# Altium PCB PCB1.PcbDoc
Units mm, origin at the board's own origin, x right, y up, seen from the top; angles counter-clockwise.
Board outline 130 x 90 mm, 4 copper layers (Top Layer, GND, PWR, Bottom Layer), stack 1.506 mm thick; 79 components, 53 nets, 215 pads, 3 vias.
Unrouted connection lines stored in the file: 20.
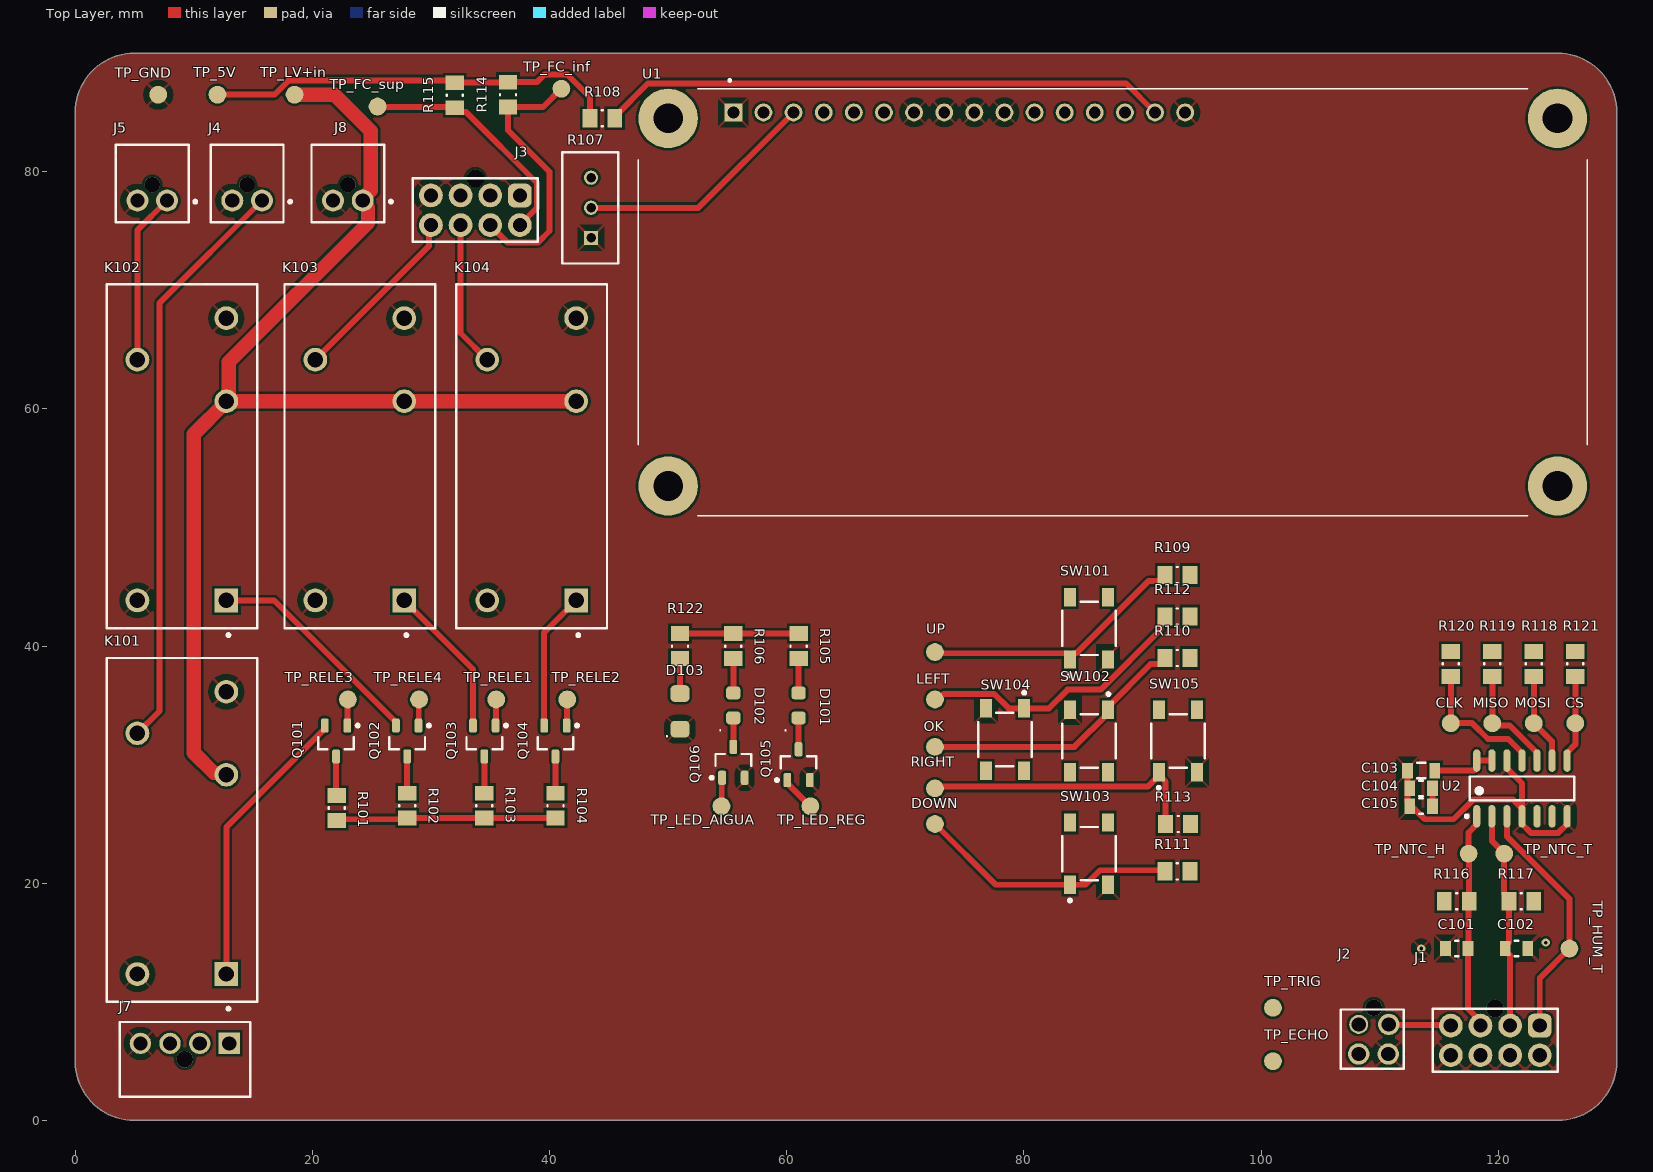
[diagram p0: Top Layer view]
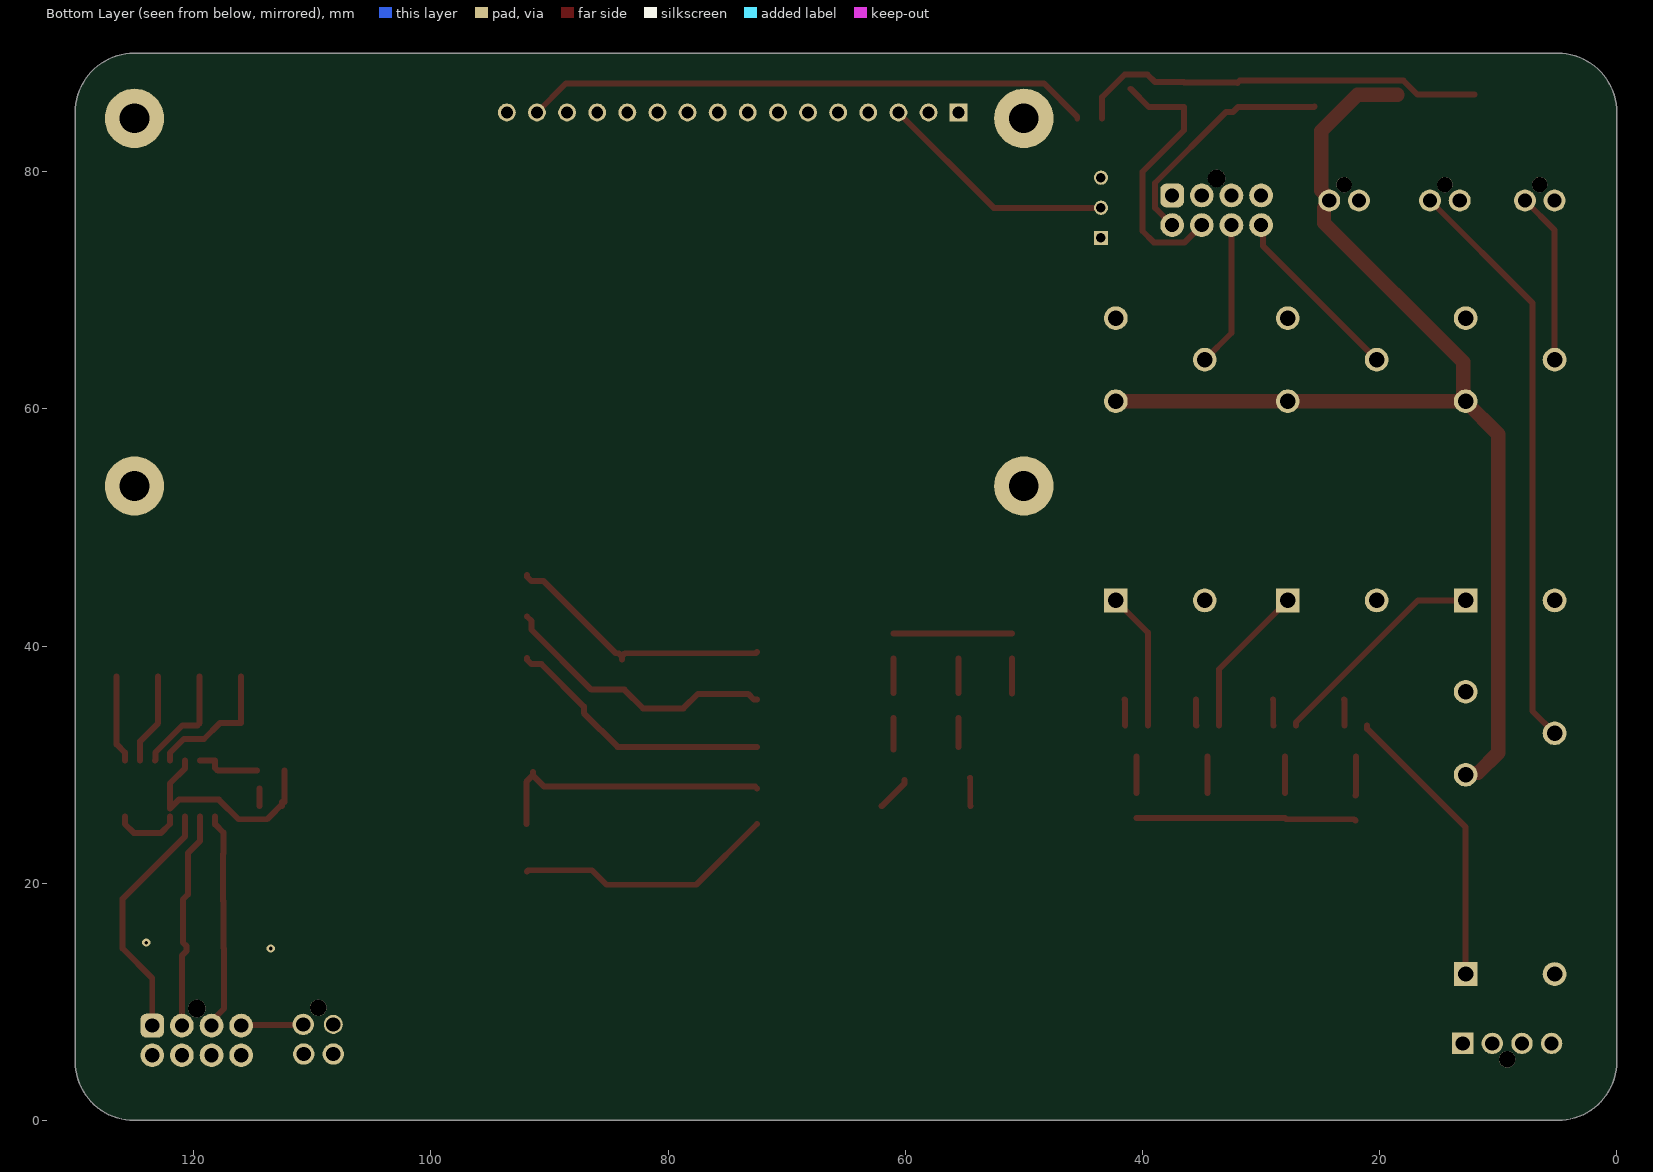
[diagram p1: Bottom Layer view, seen from below]
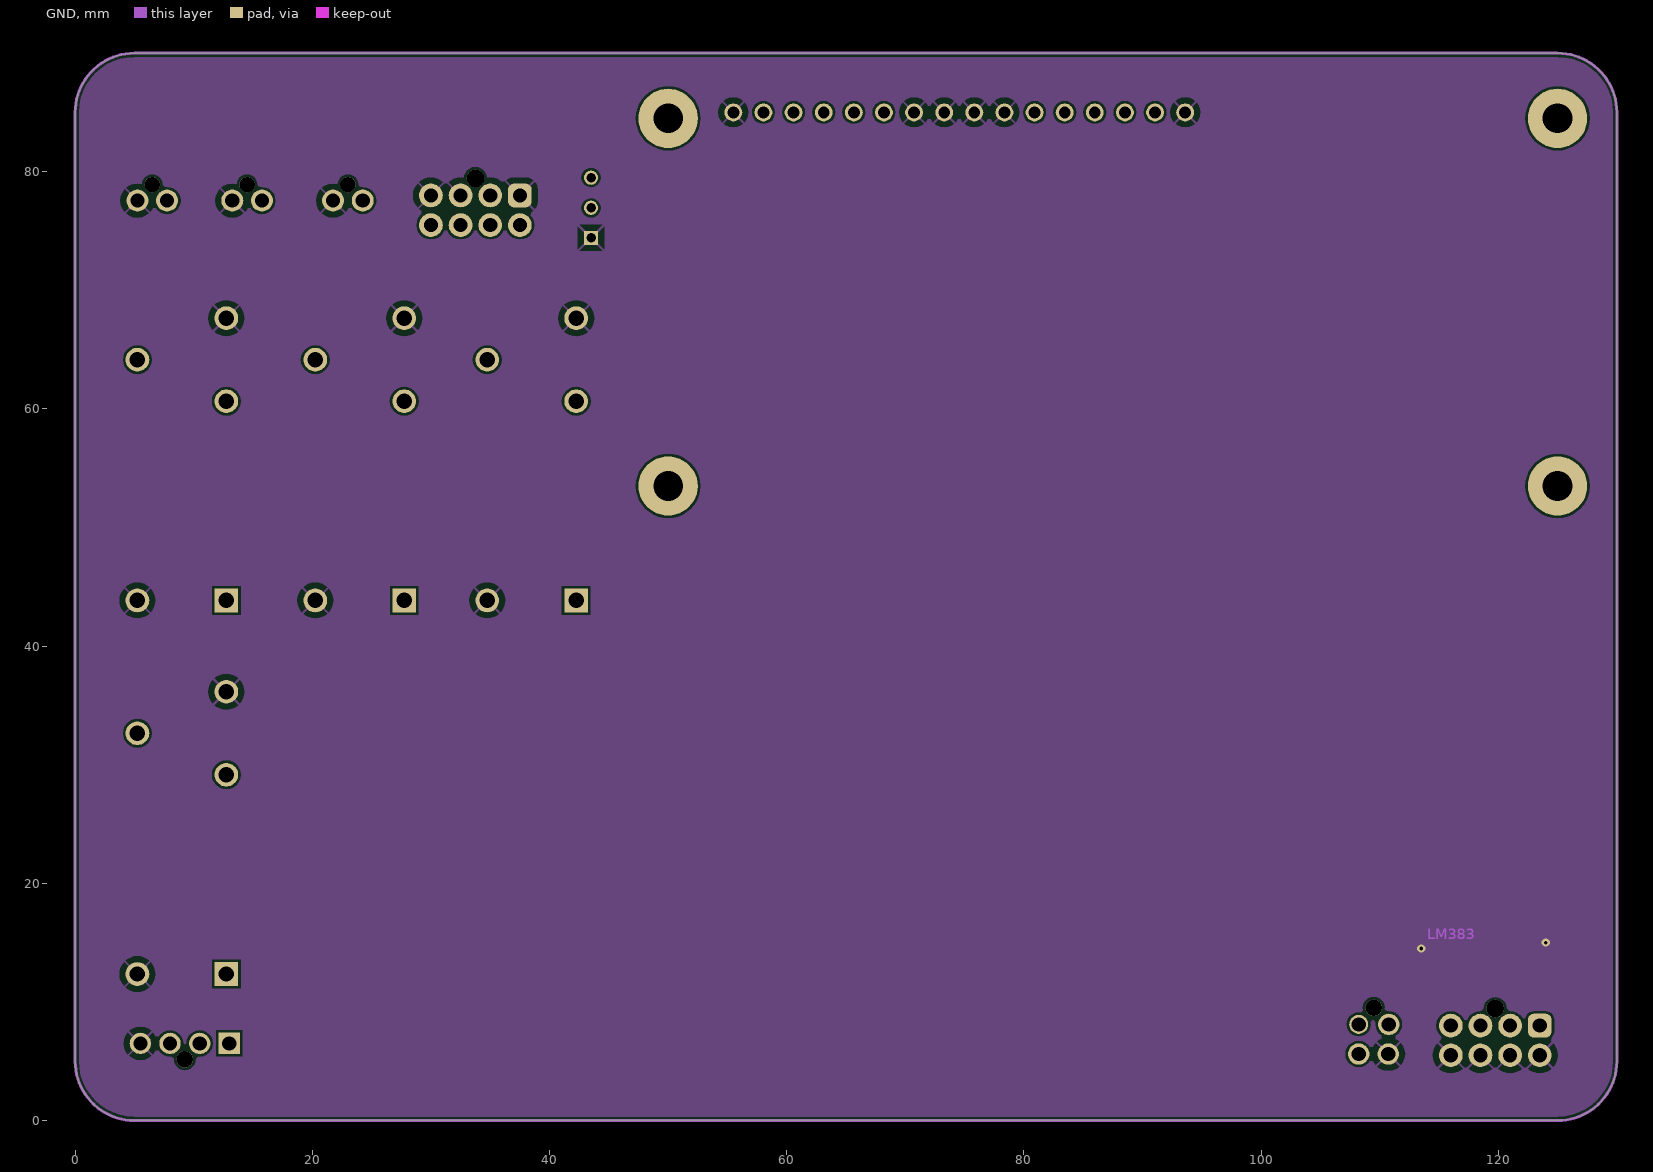
[diagram p2: GND]
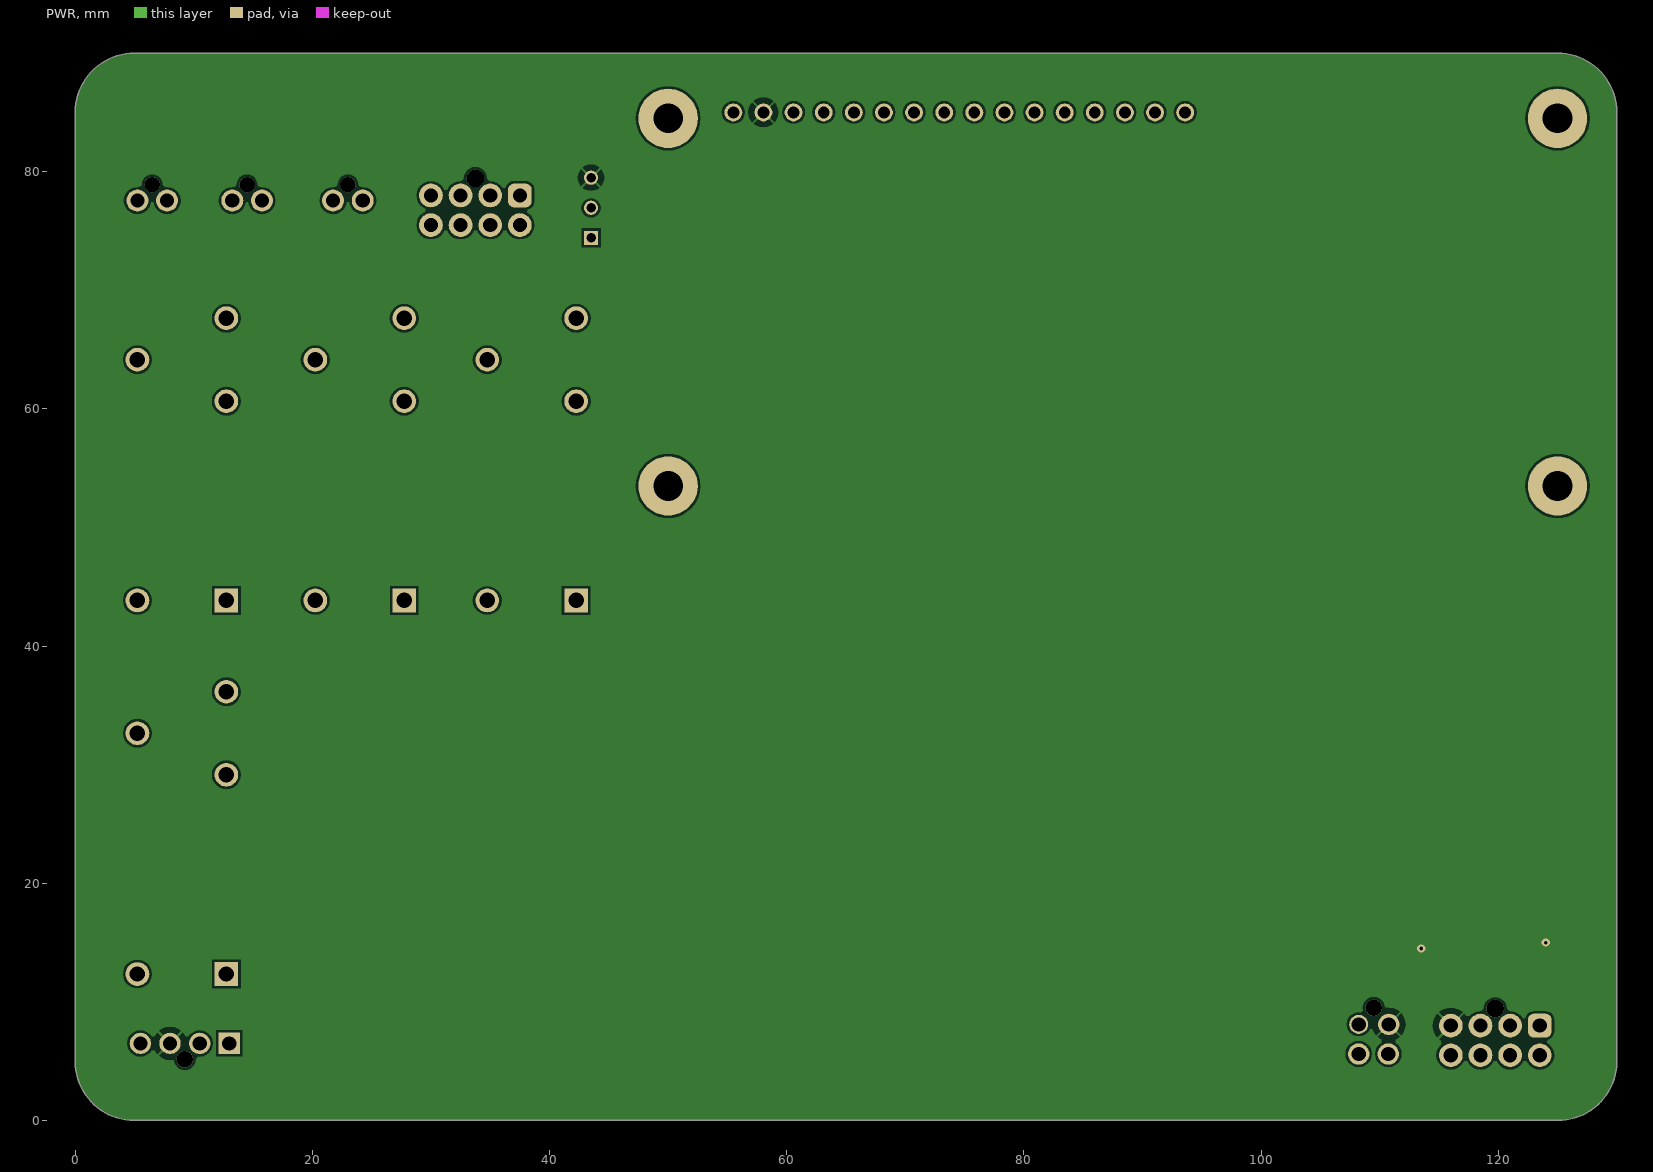
[diagram p3: PWR]
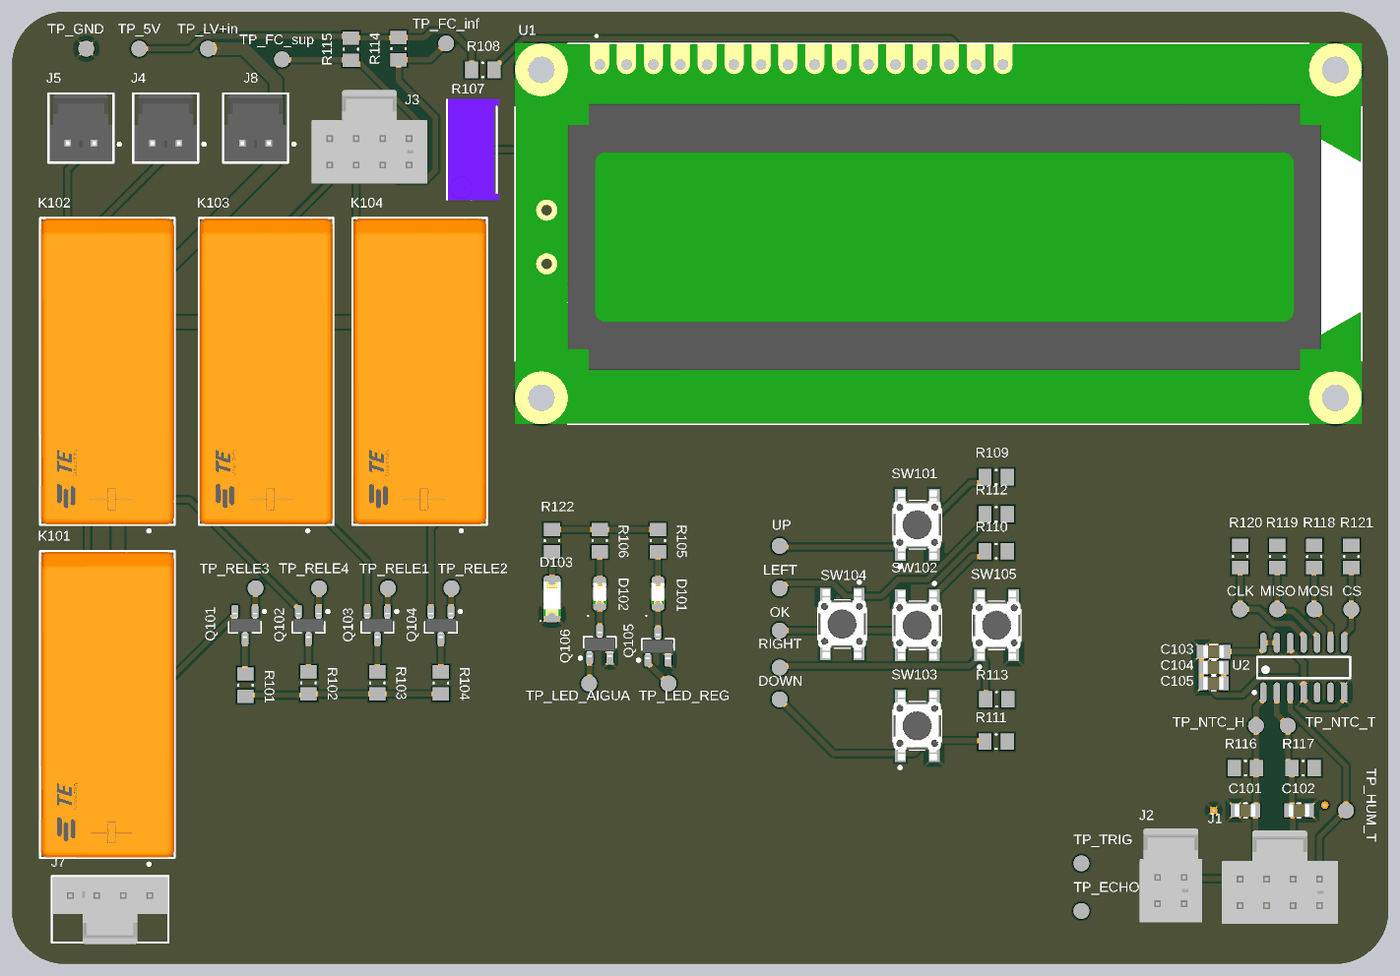
[diagram p4: 3D render of the assembled board from above, using the file's embedded part models]

## Layer stack, top to bottom
Top Solder: solder mask 0.01, Solder Resist, Dk 3.5
Top Layer: signal copper 0.035
Dielectric 2: prepreg 0.1, PP-006, Dk 4.1
GND: signal copper 0.018
Dielectric 4: prepreg 0.1, PP-006, Dk 4.1
Dielectric 1: dielectric 1, FR-4, Dk 4.8
Dielectric 5: prepreg 0.1, PP-006, Dk 4.1
PWR: signal copper 0.018
Dielectric 3: prepreg 0.1, PP-006, Dk 4.1
Bottom Layer: signal copper 0.035
Bottom Solder: solder mask 0.01, Solder Resist, Dk 3.5

## Board outline
0,5 0,85 cw(c5,85) 5,90 125,90 cw(c125,85) 130,85 130,5 cw(c125,5) 125,0 5,0 cw(c5,5)

## Design rules (kind name [scope] priority, off if disabled: settings)
Clearance [All] p1: gap=0.2 ignorepadtopadclearanceinfootprint=FALSE except(0.15: THPad-Hole)
ComponentClearance [All] p1: gap=0.2 collisioncheckmode=3 verticalgap=0.2 showdistances=FALSE
HoleSize [All] p1: absolutevalues=TRUE maxlimit=5 minlimit=0.15 maxpercent=80.000 minpercent=20.000
PlaneClearance [All] p1: clearance=0.5
PlaneConnect [All] p1: planeconnectstyle=Relief reliefexpansion=0.5 reliefentries=4 reliefconductorwidth=0.2 reliefairgap=0.5
PolygonConnect [All] p1: connectstyle=Relief reliefconductorwidth=0.2 reliefentries=4 polygonreliefangle="45 Angle" airgapwidth=0.5
RoutingCorners [All] p1: cornerstyle=45-Degree minsetback=2.5 maxsetback=2.5
RoutingVias [All] p1: holewidth=0.3 width=0.7 viastyle="Through Hole" minholewidth=0.2 minwidth=0.5 maxholewidth=5 maxwidth=8
SolderMaskExpansion [All] p1: expansion=0.102 istentingtop=FALSE
SupplyNets "Schematic Supply Nets_2" [InNet('GND')] p1: voltage=0.000
SupplyNets "Schematic Supply Nets_1" [InNet('+5')] p2: voltage=0.000
SupplyNets "Schematic Supply Nets" [InNet('LV+in')] p3: voltage=0.000
UnRoutedNet [All] p1: checkbadconnections=TRUE
Width [All] p1: maxlimit=5 minlimit=0.2 preferedwidth=0.5 midlayer1_minwidth=0.254 midlayer2_minwidth=0.254 minimp=50.000000 maximp=50.000000 favimp=50.000000
24 further rules are at their usual default settings.

## Components (designator, comment, footprint, x,y, rotation, side; value= is the part's Value field where it differs from the comment)
C101 "C100n" C0805FNPC-R 116.5,14.5 r0 top value=100nF
C102 "C100n" C0805FNPC-R 121.55,14.5 r180 top value=100nF
C103 "C100p" C0805FNPC-W 113.5,29.5 r0 top value=100pF
C104 "C100n" C0805FNPC-R 113.5,28 r0 top value=100nF
C105 "C1u" C0805FNPC-R 113.5,26.5 r0 top value=1µF
CLK "TestPoint" TestPoint 116,33.5 r90 top (schematic designator TP_CLK)
CS "TestPoint" TestPoint 126.5,33.5 r90 top (schematic designator TP_CS)
D101 "LEDYS-0805-120" LED_0805_WE 61,35 r90 top
D102 "LEDRS-0805-150" LED_0805_WE 55.5,35 r90 top
D103 "LEDGS-1206-450" LED_1206_WE 51,34.5 r90 top
DOWN "TestPoint" TestPoint 72.5,25 r180 top (schematic designator TP_DOWN)
J1 "J_NanoFit_2x4_V" J_NanoFit_2x4_V 119.75,7.469 r0 top locked
J2 "Molex_NanoFit_2x2" J_NanoFit_2x2_V 109.5,7.551 r0 top
J3 "J_NanoFit_2x4_V" J_NanoFit_2x4_V 33.75,77.468 r0 top
J4 "J_NanoFit_1x2" FP-105309-1102-MFG 14.5,79 r180 top
J5 "J_NanoFit_1x2" FP-105309-1102-MFG 6.5,79 r180 top
J7 "J_NanoFit_1x4_V" J_NanoFit_1x4_V 9.25,6.5 r0 top
J8 "J_NanoFit_1x2" FP-105309-1102-MFG 23,79 r180 top
K101 "Relay_RZ01-1C4-D005" FP-1415899-7-MFG 9,24.5 r90 top
K102 "Relay_RZ01-1C4-D005" FP-1415899-7-MFG 9,56 r90 top
K103 "Relay_RZ01-1C4-D005" FP-1415899-7-MFG 24,56 r90 top
K104 "Relay_RZ01-1C4-D005" FP-1415899-7-MFG 38.5,56 r90 top
LEFT "TestPoint" TestPoint 72.5,35.5 r180 top (schematic designator TP_LEFT)
MISO "TestPoint" TestPoint 119.5,33.5 r90 top (schematic designator TP_MISO)
MOSI "TestPoint" TestPoint 123,33.5 r90 top (schematic designator TP_MOSI)
OK "TestPoint" TestPoint 72.5,31.5 r180 top (schematic designator TP_OK)
Q101 "TRT-NPN" TRT-NPN-0.5/45-SOT23 22,32 r270 top
Q102 "TRT-NPN" TRT-NPN-0.5/45-SOT23 28,32 r270 top
Q103 "TRT-NPN" TRT-NPN-0.5/45-SOT23 34.5,32 r270 top
Q104 "TRT-NPN" TRT-NPN-0.5/45-SOT23 40.5,32 r270 top
Q105 "TRT-NPN" TRT-NPN-0.5/45-SOT23 61,30 r90 top
Q106 "TRT-NPN" TRT-NPN-0.5/45-SOT23 55.5,30.2 r90 top
R101 "R1K" 0805 22.05,26.35 r180 top value=1k
R102 "R1K" 0805 28,26.55 r180 top value=1k
R103 "R1K" 0805 34.5,26.55 r180 top value=1k
R104 "R1K" 0805 40.5,26.55 r180 top value=1k
R105 "R1K" 0805 61,40 r0 top value=1k
R106 "R1K" 0805 55.5,40 r0 top value=1k
R107 "R10k-VTR" R10k-VTR 43.5,76.96 r180 top value=10k
R108 "R1K" 0805 44.45,84.5 r90 top value=1k
R109 "R4K7" 0805 92.95,46 r270 top value=1k
R110 "R4K7" 0805 92.95,39 r270 top value=1k
R111 "R4K7" 0805 92.95,21 r270 top value=1k
R112 "R4K7" 0805 92.95,42.5 r270 top value=1k
R113 "R4K7" 0805 93,25 r270 top value=1k
R114 "R4K7" 0805 36.5,86.5 r0 top value=1k
R115 "R4K7" 0805 32,86.45 r0 top value=1k
R116 "R10K" 0805 116.5,18.5 r90 top value=1k
R117 "R10K" 0805 121.95,18.5 r270 top value=1k
R118 "R10K" 0805 123,38.5 r0 top value=1k
R119 "R10K" 0805 119.5,38.5 r0 top value=1k
R120 "R10K" 0805 116,38.5 r180 top value=1k
R121 "R10K" 0805 126.5,38.5 r180 top value=1k
R122 "R1K" 0805 51,40 r0 top value=1k
RIGHT "TestPoint" TestPoint 72.5,28 r180 top (schematic designator TP_RIGHT)
SW101 "tact_switch" FP-PTS647SK38SMTR2LFS-MFG 85.5,41.5 r90 top
SW102 "tact_switch" FP-PTS647SK38SMTR2LFS-MFG 85.5,32 r270 top
SW103 "tact_switch" FP-PTS647SK38SMTR2LFS-MFG 85.5,22.5 r90 top
SW104 "tact_switch" FP-PTS647SK38SMTR2LFS-MFG 78.4,32.125 r270 top
SW105 "tact_switch" FP-PTS647SK38SMTR2LFS-MFG 93,32 r90 top
TP_5V "TestPoint" TestPoint 12,86.5 r90 top
TP_ECHO "TestPoint" TestPoint 101,5 r90 top
TP_FC_inf "TestPoint" TestPoint 41,87 r270 top
TP_FC_sup "TestPoint" TestPoint 25.5,85.5 r270 top
TP_GND "TestPoint" TestPoint 7,86.5 r90 top
TP_HUM_T "TestPoint" TestPoint 126,14.5 r90 top
TP_LED_AIGUA "TestPoint" TestPoint 54.5,26.5 r270 top
TP_LED_REG "TestPoint" TestPoint 62,26.5 r270 top
TP_LV+in "TestPoint" TestPoint 18.5,86.5 r90 top
TP_NTC_H "TestPoint" TestPoint 117.5,22.5 r90 top
TP_NTC_T "TestPoint" TestPoint 120.5,22.5 r90 top
TP_RELE1 "TestPoint" TestPoint 35.5,35.5 r90 top
TP_RELE2 "TestPoint" TestPoint 41.5,35.5 r90 top
TP_RELE3 "TestPoint" TestPoint 23,35.5 r90 top
TP_RELE4 "TestPoint" TestPoint 29,35.5 r90 top
TP_TRIG "TestPoint" TestPoint 101,9.5 r90 top
U1 "LCD2X16" LCD_LCD2X16 87.5,69 r0 top
U2 "MCP3302-CI/SL" SOIC-SL14_L 122,28 r90 top
UP "TestPoint" TestPoint 72.5,39.5 r180 top (schematic designator TP_UP)

## Footprints (in the part's own frame and the unit in brackets; to place one, negate y for a bottom-side part, rotate by r counter-clockwise, add the part's x,y. Pads: shape width x height; smd on the part's side, far side on the other; paste and mask are expansions set on the pad)
0805 [mm] "Chip Resistor, 2-Leads, Body 2,60x1,50mm, IPC Medium Density"
  rect 1.55x1.25 smd: 1(0,-1.05) 2(0,1.05)
  silkscreen extent -0.67,-0.05 0.67,0.05, body extent -0.75,-1.3 0.75,1.3, height 0.6
C0805FNPC-R [mm]
  rect 0.9x1.3 smd: 1(-0.95,0) 2(0.95,0)
  silkscreen extent -0.15,-0.65 0.15,0.65, body extent -1.03,-0.63 0.97,0.63, height 0.96
C0805FNPC-W [mm]
  rect 0.9x1.3 smd: 1(-1.15,0) 2(1.15,0)
  silkscreen extent -0.35,-0.65 0.35,0.65, body extent -1,-0.63 1,0.63, height 0.96
FP-105309-1102-MFG [mm]
  round 1.85 hole 1.2 paste-2539.97 mask+0: 1(-1.25,1.43) 2(1.25,1.43)
  round 1.3 hole 1.3 unplated paste-2539.97 mask+0: ""(0,0.09)
  silkscreen extent -3.75,-3.27 3.07,3.27, body extent -3.17,-3.37 3.17,3.37, height 0.25
FP-1415899-7-MFG [mm]
  round 2 hole 1.3 paste-2539.97 mask+0: 11(8.15,3.75) 12(4.65,-3.75) 14(11.65,-3.75) A2(-12.15,3.75)
  rect 2x2 hole 1.3 paste-2539.97 mask+0: A1(-12.15,-3.75)
  silkscreen extent -15.2,-6.35 14.5,6.35, body extent -14.6,-6.45 14.6,6.45, height 0.25
FP-PTS647SK38SMTR2LFS-MFG [mm]
  rect 1.55x1 smd paste+0 mask+0: 1(-2.625,1.6) 2(2.625,1.6) 3(-2.625,-1.6) 4(2.625,-1.6)
  silkscreen extent -4.07,-2.25 2.25,2.25, body extent -3.5,-2.35 3.5,2.35, height 0.25
J_NanoFit_1x4_V [mm]
  round 1.4 hole 1.4: 0(0,-1.34)
  rect 1.8x1.8 hole 1.2: 1(3.75,0)
  round 1.8 hole 1.2: 2(1.25,0) 3(-1.25,0) 4(-3.75,0)
  silkscreen extent -5.5,-4.5 5.5,1.8, body extent -5.47,-4.65 5.47,1.69, height 10.68
J_NanoFit_2x2_V [mm]
  round 1.8 hole 1.2: 1(1.27,0.552) 2(1.23,-1.949) 4(-1.27,-1.949)
  round 1.6 hole 1.2: 3(-1.27,0.552)
  round 1.4 hole 1.4: 5(0,1.949)
  silkscreen extent -2.79,-3.2 2.54,1.8, body extent -3.02,-3.61 2.92,5.23, height 9.92
J_NanoFit_2x4_V [mm]
  rrect50% 2x2 hole 1.2: 1(3.75,0.532)
  round 2 hole 1.2: 2(1.25,0.532) 3(-1.25,0.532) 4(-3.75,0.532) 5(3.75,-1.968) 6(1.25,-1.968) 7(-1.25,-1.968) 8(-3.75,-1.968)
  round 1.5 hole 1.5: 9(-0.004,1.968)
  silkscreen extent -5.27,-3.37 5.27,1.97, body extent -5.47,-3.71 5.47,5.13, height 9.92
LCD_LCD2X16 [mm]
  rect 1.508x1.508 / inner round 1.508 / far side rect 1.508x1.508 hole 1: 1(-32,16)
  round 1.508 hole 1: 2(-29.46,16) 3(-26.92,16) 4(-24.38,16) 5(-21.84,16) 6(-19.3,16) 7(-16.76,16) 8(-14.22,16) 9(-11.68,16) 10(-9.14,16) 11(-6.6,16) 12(-4.06,16) 13(-1.52,16) 14(1.02,16) 15(3.56,16) 16(6.1,16)
  round 5 hole 2.5: S1(-37.5,15.5) S2(37.5,15.5) S3(37.5,-15.5) S4(-37.5,-15.5)
  silkscreen extent -40,-18 40,18.8, body extent -40,-18 40,18, height 7
LED_0805_WE [mm] "SODFL, 2-Leads, Body 1,60x3,20mm, IPC Medium Density"
  rrect50% 1.1x1.2 smd: A(1.05,0) K(-1.05,0)
  silkscreen extent -2.15,1.05 -2.05,1.15, body extent -1,-0.62 1,0.63, height 0.7
LED_1206_WE [mm] "SODFL, 2-Leads, Body 1,60x3,20mm, IPC Medium Density"
  rrect50% 1.4x1.6 smd: A(1.5,0) K(-1.5,0)
  silkscreen extent -2.15,1.05 -2.05,1.15, body extent -1.6,-0.8 1.6,0.8, height 0.68
R10k-VTR [mm]
  rect 1.2x1.2 hole 0.8: 1(0,2.54)
  round 1.2 hole 0.8: 2(0,-2.54) 3(0,0)
  silkscreen extent -2.29,-4.7 2.41,4.7, body extent -2.49,-4.78 2.34,4.78, height 11.09
SOIC-SL14_L [mm] "SOIC, 14-Leads, Body 8.7x3.9mm, Pitch 1.27mm, IPC High Density"
  oval 1.9x0.6 smd: 1(-2.35,3.81) 2(-2.35,2.54) 3(-2.35,1.27) 4(-2.35,0) 5(-2.35,-1.27) 6(-2.35,-2.54) 7(-2.35,-3.81) 8(2.35,-3.81) 9(2.35,-2.54) 10(2.35,-1.27) 11(2.35,0) 12(2.35,1.27) 13(2.35,2.54) 14(2.35,3.81)
  silkscreen extent -2.47,-4.4 1,4.78, body extent -2,-4.38 2,4.38, height 1.75
TestPoint [mm]
  round 1.5 smd: 1(0,0)
TRT-NPN-0.5/45-SOT23 [mm] "SOT23, 3-Leads, Body 2,92x2,37mm, Pitch 0,95mm, IPC Low Density"
  rrect50% 1.2x0.65 smd: B(-1.3,0.95) C(1.3,0) E(-1.3,-0.95)
  silkscreen extent -1.42,-1.5 0.7,1.95, body extent -1.18,-1.46 1.19,1.46, height 1.12

## Part data
C101 C102 C104: library part CMP-00063-3, "Cap, 0.1ΜF, 50V, 10%, X7R, 0805", Case Code (Metric)=2012, Case/Package=0805, Dielectric=X7R, Manufacturer 1="Wurth Electronics", Manufacturer Part Number 1=885012207098, Max Operating Temperature=125°C, Min Operating Temperature=-55°C, Tolerance=10%, Voltage Rating=50V, .Creator=DR, Category="Ceramic Capacitors", ComponentLink1Description=http://www.farnell.com/datasheets/1958498.pdf?src-supplier=Farnell, ComponentLink1URL=http://www.farnell.com/datasheets/1958498.pdf?src-supplier=Farnell, ComponentLink2Description=http://www.farnell.com/datasheets/1958498.pdf?src-supplier=Element14, ComponentLink2URL=http://www.farnell.com/datasheets/1958498.pdf?src-supplier=Element14, ComponentLink3Description=https://katalog.we-online.de/pbs/datasheet/885012207098.pdf?src-supplier=Digi-Key, ComponentLink3URL=https://katalog.we-online.de/pbs/datasheet/885012207098.pdf?src-supplier=Digi-Key, ComponentLink4Description=http://www.farnell.com/datasheets/1958498.pdf?src-supplier=Newark, ComponentLink4URL=http://www.farnell.com/datasheets/1958498.pdf?src-supplier=Newark, Design Item ID=C100n-50V-0805FNPC-X7R, Length=0.079inch, Mount="Surface Mount", Packaging="Cut Tape", Pricing 1="100=0,10200, 500=0,07100, 2000=0,06100 (GBP)", REACH SVHC=Unknown, RoHS=Yes, RoHS Compliant=Yes, Source=Passives.SchLib, Stock 1=8000, Thickness=0.035inch, Voltage Rating (DC)=50V, Width=0.049inch
C103: library part CMP-00068-3, "Multilayer Ceramic Capacitor, Wcap-Csgp Series, 100 Pf, 5%, C0G / Np0, 50 V, 0805 [2012 Metric] Rohs Compliant: Yes", Case Code (Metric)=2012, Case/Package=0805, Dielectric=C0G, Manufacturer="Wurth Electronics", Manufacturer Part Number=885012007057, Max Operating Temperature=125°C, Min Operating Temperature=-55°C, Tolerance=5%, Voltage Rating=50V, .Creator=DR, Category="Ceramic Capacitors", ComponentLink1Description=http://www.farnell.com/datasheets/1958443.pdf?src-supplier=Farnell, ComponentLink1URL=http://www.farnell.com/datasheets/1958443.pdf?src-supplier=Farnell, ComponentLink2Description=https://katalog.we-online.de/pbs/datasheet/885012007057.pdf?src-supplier=Digi-Key, ComponentLink2URL=https://katalog.we-online.de/pbs/datasheet/885012007057.pdf?src-supplier=Digi-Key, ComponentLink3Description=http://www.farnell.com/datasheets/1958443.pdf?src-supplier=Element14, ComponentLink3URL=http://www.farnell.com/datasheets/1958443.pdf?src-supplier=Element14, ComponentLink4Description=http://www.farnell.com/datasheets/1958443.pdf?src-supplier=Newark, ComponentLink4URL=http://www.farnell.com/datasheets/1958443.pdf?src-supplier=Newark, ComponentLink5Description="Where buy it", ComponentLink5URL=https://www.we-online.com/catalog/en/WCAP-CSGP-50VDC#885012007057, Design Item ID=C100p-50V-0805FNPC-C0G/NP0, Length=0.079inch, Mount="Surface Mount", Packaging="Cut Tape", Pricing 1="4000=0,03900, 12000=0,03800 (USD)", REACH SVHC=Unknown, RoHS=Yes, RoHS Compliant=Yes, Source=Passives.SchLib, Stock 1=1, Thickness=0.035inch, Voltage Rating (DC)=50V, Width=0.049inch
C105: library part CMP-00052-2, "Multilayer Ceramic Capacitor, Wcap-Csgp Series, 1 F, 10%, X7R, 50 V, 0805 [2012 Metric] Rohs Compliant: Yes", Case Code (Metric)=2012, Case/Package=0805, Dielectric=X7R, Manufacturer 1="Wurth Electronics", Manufacturer Part Number 1=885012207103, Max Operating Temperature=85°C, Min Operating Temperature=-55°C, Tolerance=10%, Voltage Rating=50V, .Creator=GP, Category="Ceramic Capacitors", ComponentLink1Description=http://www.farnell.com/datasheets/1958501.pdf?src-supplier=Farnell, ComponentLink1URL=http://www.farnell.com/datasheets/1958501.pdf?src-supplier=Farnell, ComponentLink2Description=http://www.farnell.com/datasheets/1958501.pdf?src-supplier=Element14, ComponentLink2URL=http://www.farnell.com/datasheets/1958501.pdf?src-supplier=Element14, ComponentLink3Description=https://katalog.we-online.de/pbs/datasheet/885012107003.pdf?src-supplier=Digi-Key, ComponentLink3URL=https://katalog.we-online.de/pbs/datasheet/885012107003.pdf?src-supplier=Digi-Key, ComponentLink4Description=http://www.farnell.com/datasheets/1958501.pdf?src-supplier=Newark, ComponentLink4URL=http://www.farnell.com/datasheets/1958501.pdf?src-supplier=Newark, Design Item ID=C1u-50V-0805FNPC-X7R, Length=0.079inch, Mount="Surface Mount", Packaging="Cut Tape", Pricing 1="50=0,27200, 250=0,25300, 500=0,22800, 1250=0,20100, 2500=0,17100 (GBP)", REACH SVHC=Unknown, RoHS=Yes, RoHS Compliant=Yes, Source=Passives.SchLib, Stock 1=5100, Thickness=0.053inch, Voltage Rating (DC)=50V, Width=0.049inch
CLK CS DOWN LEFT MISO MOSI OK RIGHT TP_5V TP_ECHO TP_FC_inf TP_FC_sup TP_GND TP_HUM_T TP_LED_AIGUA TP_LED_REG TP_LV+in TP_NTC_H TP_NTC_T TP_RELE1 TP_RELE2 TP_RELE3 TP_RELE4 TP_TRIG UP: library part CMP-00042-2, "Test Point 1x1 mm", .Creator=GP, .PCBcheck=GP, .SCHcheck=GP, Category=TestPoint, Design Item ID=TestPoint, Source=e-Tech_Racing.SchLib
D101: library part CMP-00136-1, "2 V Yellow LED 2012 (0805) SMD, Wurth Elektronik WL-SMCW 150080YS75000", Case Code (Imperial)=0805, Case Code (Metric)=2012, Color=Yellow, Forward Current=30mA, Forward Voltage=2V, Manufacturer 1="Wurth Electronics", Manufacturer Part Number 1=150080YS75000, Max Operating Temperature=85°C, Min Operating Temperature=-40°C, Package Quantity=4000, Test Current=20mA, .Creator=DR, Case/Package=0805, Category=LEDs, ComponentLink1Description=Datasheet, ComponentLink1URL=https://www.we-online.com/catalog/datasheet/150080YS75000.pdf, ComponentLink2Description="Where buy it", ComponentLink2URL=https://katalog.we-online.de/en/led/WL-SMCW/150080YS75000, ComponentLink3Description=https://datasheet.ciiva.com/23843/150080ys75000-23843256.pdf?src-supplier=Newark, ComponentLink3URL=https://datasheet.ciiva.com/23843/150080ys75000-23843256.pdf?src-supplier=Newark, ComponentLink4Description=https://datasheet.ciiva.com/29279/759438-da-01-en-chipled-0805-w-kl-gelb-150080ys75000-29279034.pdf?src-supplier=Conrad, ComponentLink4URL=https://datasheet.ciiva.com/29279/759438-da-01-en-chipled-0805-w-kl-gelb-150080ys75000-29279034.pdf?src-supplier=Conrad, ComponentLink5Description=https://datasheet.ciiva.com/22656/1911353-22656971.pdf?src-supplier=Element14, ComponentLink5URL=https://datasheet.ciiva.com/22656/1911353-22656971.pdf?src-supplier=Element14, ComponentLink6Description=https://datasheet.ciiva.com/29563/150080ys75000-29563019.pdf?src-supplier=Digi-Key, ComponentLink6URL=https://datasheet.ciiva.com/29563/150080ys75000-29563019.pdf?src-supplier=Digi-Key, ComponentLink7Description=https://datasheet.ciiva.com/29563/150080ys75000-29563020.pdf?src-supplier=Digi-Key, ComponentLink7URL=https://datasheet.ciiva.com/29563/150080ys75000-29563020.pdf?src-supplier=Digi-Key, ComponentLink8Description=https://datasheet.ciiva.com/29563/150080ys75000-29563021.pdf?src-supplier=Digi-Key, ComponentLink8URL=https://datasheet.ciiva.com/29563/150080ys75000-29563021.pdf?src-supplier=Digi-Key, Design Item ID=LEDYS-0805-120, Dominant Wavelength=590nm, Height=0.7mm, Length=2mm, Lens Style=Clear,Rectangular, Luminous Intensity=120mcd, Mount="Surface Mount", Packaging="Tape and Reel", Pricing 1="50=0,19300, 500=0,12900, 750=0,12300, 1500=0,11700, 3000=0,11100 (USD)", REACH SVHC=Unknown, RoHS=Yes, RoHS Compliant=Yes, Source=Semiconductor.SchLib, Stock 1=2100, Viewing Angle=140°, Wavelength=590nm, Width=1.25mm
D102: library part CMP-00133-1, "0805(H=0.8mm) 红色 高亮 λD=625nm VF=2V IF=30mA PD=72mW", Case Code (Imperial)=0805, Case Code (Metric)=2012, Color=Red, Forward Current=30mA, Forward Voltage=2V, Manufacturer 1="Wurth Electronics", Manufacturer Part Number 1=150080RS75000, Max Operating Temperature=85°C, Min Operating Temperature=-40°C, Package Quantity=4000, Test Current=20mA, .Creator=DR, Case/Package=0805, Category=LEDs, ComponentLink1Description=Datasheet, ComponentLink1URL=https://www.we-online.com/catalog/datasheet/150080RS75000.pdf, ComponentLink2Description="Where buy it", ComponentLink2URL=https://katalog.we-online.de/en/led/WL-SMCW/150080RS75000, ComponentLink3Description=https://datasheet.ciiva.com/22656/150080rs75000-22656961.pdf?src-supplier=Element14, ComponentLink3URL=https://datasheet.ciiva.com/22656/150080rs75000-22656961.pdf?src-supplier=Element14, ComponentLink4Description=https://datasheet.ciiva.com/29279/759435-da-01-en-chipled-0805-w-kl-rot-150080rs75000-29279032.pdf?src-supplier=Conrad, ComponentLink4URL=https://datasheet.ciiva.com/29279/759435-da-01-en-chipled-0805-w-kl-rot-150080rs75000-29279032.pdf?src-supplier=Conrad, Design Item ID=LEDRS-0805-150, Dominant Wavelength=625nm, Height=0.7mm, Length=2mm, Lens Style=Clear,Rectangular, Luminous Intensity=150mcd, Mount="Surface Mount", Packaging="Tape and Reel", Pricing 1="50=0,19300, 500=0,12900, 1000=0,12300, 2000=0,11700, 4000=0,11100 (USD)", REACH SVHC=Unknown, RoHS=Yes, RoHS Compliant=Yes, Source=Semiconductor.SchLib, Stock 1=1, Viewing Angle=140°, Wavelength=625nm, Width=1.25mm
D103: library part CMP-00132-1, "Led, Green, 520 Nm, 3.2 V, 30 Ma, 450 Mcd Rohs Compliant: Yes", Case Code (Imperial)=1206, Case Code (Metric)=3216, Color=Green, Forward Current=30mA, Forward Voltage=3.2V, Manufacturer="Wurth Electronics", Manufacturer Part Number=150120GS75000, Max Operating Temperature=85°C, Min Operating Temperature=-40°C, Package Quantity=3000, Test Current=20mA, .Creator=GP, Case/Package=1206, Category=LEDs, ComponentLink1Description=https://datasheet.ciiva.com/22656/150120gs75000-22656979.pdf?src-supplier=Element14, ComponentLink1URL=https://datasheet.ciiva.com/22656/150120gs75000-22656979.pdf?src-supplier=Element14, ComponentLink2Description=https://datasheet.ciiva.com/29279/759441-da-01-en-chipled-1206-w-kl-gruen-150120gs75000-29279042.pdf?src-supplier=Conrad, ComponentLink2URL=https://datasheet.ciiva.com/29279/759441-da-01-en-chipled-1206-w-kl-gruen-150120gs75000-29279042.pdf?src-supplier=Conrad, ComponentLink3Description=https://datasheet.ciiva.com/48430/150120gs75000-eng-tds-48430053.pdf?src-supplier=Distrelec, ComponentLink3URL=https://datasheet.ciiva.com/48430/150120gs75000-eng-tds-48430053.pdf?src-supplier=Distrelec, ComponentLink4Description=https://datasheet.ciiva.com/29561/150120gs75000-29561883.pdf?src-supplier=Digi-Key, ComponentLink4URL=https://datasheet.ciiva.com/29561/150120gs75000-29561883.pdf?src-supplier=Digi-Key, ComponentLink5Description=https://datasheet.ciiva.com/29561/150120gs75000-29561884.pdf?src-supplier=Digi-Key, ComponentLink5URL=https://datasheet.ciiva.com/29561/150120gs75000-29561884.pdf?src-supplier=Digi-Key, ComponentLink6Description=https://datasheet.ciiva.com/29561/150120gs75000-29561885.pdf?src-supplier=Digi-Key, ComponentLink6URL=https://datasheet.ciiva.com/29561/150120gs75000-29561885.pdf?src-supplier=Digi-Key, ComponentLink7Description="Where buy it", ComponentLink7URL=https://www.we-online.com/catalog/en/WL-SMCW?sq=150120GS75000#150120GS75000, Design Item ID=LEDGS-1206-450, Dominant Wavelength=520nm, Height=0.68mm, Length=3.2mm, Lens Style=Clear,Rectangular, Luminous Intensity=450mcd, Mount="Surface Mount", Packaging="Tape and Reel", Pricing 1="50=0,23200, 500=0,16400, 750=0,15500, 1500=0,15000, 3000=0,14200 (USD)", REACH SVHC=Unknown, RoHS=Yes, RoHS Compliant=Yes, Source=Semiconductor.SchLib, Stock 1=1, Viewing Angle=140°, Wavelength=520nm, Width=1.6mm
J1 J3: library part CMP-00019-1, "Nano-Fit Conn Power HDR 8 POS 2.5mm Solder ST Thru-Hole 8 Terminal 1 Port Nano-Fit™ Frame", Manufacturer=Molex, Manufacturer Part Number=105310-1108, Category="Headers and Wire Housings", ComponentLink1Description=Datasheet, ComponentLink1URL=https://www.molex.com/pdm_docs/sd/1053101108_sd.pdf, ComponentLink2Description=https://www.molex.com/pdm_docs/ps/PS-105300-100-001.pdf?src-supplier=Digi-Key, ComponentLink2URL=https://www.molex.com/pdm_docs/ps/PS-105300-100-001.pdf?src-supplier=Digi-Key, ComponentLink3Description=http://www.farnell.com/datasheets/2551089.pdf?src-supplier=Newark, ComponentLink3URL=http://www.farnell.com/datasheets/2551089.pdf?src-supplier=Newark, ComponentLink4Description="Where buy it", ComponentLink4URL=https://www.molex.com/molex/products/part-detail/pcb_headers/1053101108, Design Item ID=J_NanoFit_2x4_V, Pricing 1="8=1,52500, 40=0,87900, 80=0,83600 (GBP)", RoHS=No, Source=Electromechanical.SchLib, Stock 1=1512
J2: library part CMP-00005-3, "Nano-Fit Vertical Header Through Hole 2.50mm Pitch Dual Row 4 Circuits Tin (Sn) Plating Black", Manufacturer=Molex, Manufacturer Part Number=1053141104, Maximum current="7.5 A", Maximum voltage="750 V AC", Temperature rating="-40° to +105°C", .Creator=GP, Application="Wire to board", Category=Connector, Category type="PCB header", ComponentLink1Description=Datasheet, ComponentLink1URL=https://www.molex.com/molex/products/part-detail/pcb_headers/1053141104, ComponentLink2Description="Where buy it", ComponentLink3Description=http://www.farnell.com/datasheets/2551094.pdf?src-supplier=Farnell, ComponentLink3URL=http://www.farnell.com/datasheets/2551094.pdf?src-supplier=Farnell, ComponentLink4Description=http://www.farnell.com/datasheets/2551094.pdf?src-supplier=Newark, ComponentLink4URL=http://www.farnell.com/datasheets/2551094.pdf?src-supplier=Newark, Connections=2x2, Design Item ID=J_Supply, Flammability=94V-0, Mount="Through hole", Orientation="Right Angle", Pricing 1="1=1,25000, 10=1,03600, 300=0,86330, 1200=0,69065, 5100=0,60432, 10200=0,57410 (USD)", Product name=Nano-Fit, Source=Electromechanical.SchLib, Stock 1=3160
J4 J5 J8: library part CMP-002-00001-2, "Conn HDR 2 POS 2.5mm Solder ST Thru-Hole 2 Terminal 1 Port Nano-Fit Tray"
J7: library part CMP-00018-1, "Nano-Fit Vertical Header Through Hole 2.50mm Pitch Single Row 4 Circuits with Kinked Pins 0.38", Manufacturer 1=Molex, Manufacturer Part Number 1=105309-1204, .Creator=DO, Category="Headers and Wire Housings", ComponentLink1Description=http://farnell.com//datasheets/2221349.pdf?src-supplier=Farnell, ComponentLink1URL=http://farnell.com//datasheets/2221349.pdf?src-supplier=Farnell, ComponentLink2Description=http://www.farnell.com/datasheets/2221349.pdf?src-supplier=Newark, ComponentLink2URL=http://www.farnell.com/datasheets/2221349.pdf?src-supplier=Newark, ComponentLink3Description=http://www.literature.molex.com/SQLImages/kelmscott/Molex/PDF_Images/987651-1223.PDF?src-supplier=Digi-Key, ComponentLink3URL=http://www.literature.molex.com/SQLImages/kelmscott/Molex/PDF_Images/987651-1223.PDF?src-supplier=Digi-Key, ComponentLink4Description=http://www.farnell.com/datasheets/2059602.pdf?src-supplier=Element14, ComponentLink4URL=http://www.farnell.com/datasheets/2059602.pdf?src-supplier=Element14, Design Item ID=J_NanoFit_1x4_V, Pricing 1="1=1,37050, 10=1,11700, 100=0,95270, 500=0,86980, 1000=0,74060, 2500=0,71930, 5000=0,68450, 10000=0,66860 (USD)", RoHS=No, Source=Electromechanical.SchLib, Stock 1=709
K101 K102 K103 K104: library part CMP-00028-00000-1, "Power/Signal Relay, SPDT, Momentary, 0.084A (Coil), 5VDC (Coil), 420mW (Coil), DC Input, AC Output, Through Hole-Straight Mount. 1415899-7. RZ01-1C4-D005", Max Operating Temperature=85°C, Min Operating Temperature=-40°C, Mounting Technology="Through Hole", RoHS Compliant=Yes
Q101 Q102 Q103 Q104 Q105 Q106: library part CMP-00148-1, "ON Semi BC817-25LT1G NPN Bipolar Transistor; 0.5 A; 45 V; 3-Pin SOT-23", Case/Package=SOT-23-3, Collector Base Voltage (VCBO)=50V, Collector Emitter Breakdown Voltage=45V, Collector Emitter Saturation Voltage=700mV, Current Rating=500mA, Emitter Base Voltage (VEBO)=5V, Frequency=100MHz, Package Quantity=1, Power Dissipation=300mW, .Creator=GP, Category=Transistor, Collector Emitter Voltage (VCEO)=45V, Collector-emitter Voltage-Max=700mV, ComponentLink1Description=Datasheet, ComponentLink2Description="Where buy it", ComponentLink3Description=https://datasheet.ciiva.com/27748/2010413-27748829.pdf?src-supplier=Jameco, ComponentLink3URL=https://datasheet.ciiva.com/27748/2010413-27748829.pdf?src-supplier=Jameco, ComponentLink4Description=https://datasheet.ciiva.com/15138/getdatasheetpartid-38405-15138602.pdf?src-supplier=Verical, ComponentLink4URL=https://datasheet.ciiva.com/15138/getdatasheetpartid-38405-15138602.pdf?src-supplier=Verical, ComponentLink5Description=https://datasheet.ciiva.com/1196/bc817-16lt1-d-1196558.pdf?src-supplier=Element14, ComponentLink5URL=https://datasheet.ciiva.com/1196/bc817-16lt1-d-1196558.pdf?src-supplier=Element14, ComponentLink6Description=https://datasheet.ciiva.com/22641/bc817-16lt1-d-22641013.pdf?src-supplier=Farnell, ComponentLink6URL=https://datasheet.ciiva.com/22641/bc817-16lt1-d-22641013.pdf?src-supplier=Farnell, ComponentLink7Description=https://datasheet.ciiva.com/22664/bc817-16lt1-d-22664204.pdf?src-supplier=Element14, ComponentLink7URL=https://datasheet.ciiva.com/22664/bc817-16lt1-d-22664204.pdf?src-supplier=Element14, ComponentLink8Description=https://datasheet.ciiva.com/22664/1842041-22664101.pdf?src-supplier=Element14, ComponentLink8URL=https://datasheet.ciiva.com/22664/1842041-22664101.pdf?src-supplier=Element14, ComponentLink9Description=https://datasheet.ciiva.com/4722/bc817-16lt1-d-104560-4722229.pdf?src-supplier=Mouser, ComponentLink9URL=https://datasheet.ciiva.com/4722/bc817-16lt1-d-104560-4722229.pdf?src-supplier=Mouser, ComponentLink10Description=https://datasheet.ciiva.com/1195/bc817-16lt1-d-1195763.pdf?src-supplier=Element14, ComponentLink10URL=https://datasheet.ciiva.com/1195/bc817-16lt1-d-1195763.pdf?src-supplier=Element14, ComponentLink11Description=https://datasheet.ciiva.com/1195/bc817-16lt1-d-1195764.pdf?src-supplier=Element14, ComponentLink11URL=https://datasheet.ciiva.com/1195/bc817-16lt1-d-1195764.pdf?src-supplier=Element14, ComponentLink12Description=https://datasheet.ciiva.com/11197/bc817-16lt1-d-11197514.pdf?src-supplier=Avnet, ComponentLink12URL=https://datasheet.ciiva.com/11197/bc817-16lt1-d-11197514.pdf?src-supplier=Avnet, ComponentLink13Description=https://datasheet.ciiva.com/25996/bc817-16lt1-d-25996327.pdf?src-supplier=Avnet+Europe, ComponentLink13URL=https://datasheet.ciiva.com/25996/bc817-16lt1-d-25996327.pdf?src-supplier=Avnet+Europe, ComponentLink14Description=https://datasheet.ciiva.com/976/bc817-16lt1-d-976357.pdf?src-supplier=Digi-Key, ComponentLink14URL=https://datasheet.ciiva.com/976/bc817-16lt1-d-976357.pdf?src-supplier=Digi-Key, ComponentLink15Description=https://datasheet.ciiva.com/976/bc817-16lt1-d-976358.pdf?src-supplier=Digi-Key, ComponentLink15URL=https://datasheet.ciiva.com/976/bc817-16lt1-d-976358.pdf?src-supplier=Digi-Key, ComponentLink16Description=https://datasheet.ciiva.com/976/bc817-16lt1-d-976356.pdf?src-supplier=Digi-Key, ComponentLink16URL=https://datasheet.ciiva.com/976/bc817-16lt1-d-976356.pdf?src-supplier=Digi-Key, Contact Plating=Tin,Matte, Design Item ID=TRT-NPN-0.5/45-SOT23, Element Configuration=Single, Gain Bandwidth Product=100MHz, Halogen Free="Halogen Free", Height=0.94mm, hFE Min=160, Lead Free="Lead Free", Length=2.9mm, Max Breakdown Voltage=45V, Max Collector Current=500mA, Max Frequency=100MHz, Number of Elements=1, Number of Pins=3, Pricing 1="1=0,20000, 10=0,18500, 100=0,10080, 500=0,06204, 1000=0,04229 (USD)", Radiation Hardening=No, REACH SVHC="No SVHC", RoHS Compliant=Yes, Series=-, Source=Semiconductor.SchLib, Transition Frequency=100MHz, Width=1.3mm
R101 R102 R103 R104 R105 R106 R108 R109 R110 R111 R112 R113 R114 R115 R116 R117 R118 R119 R120 R121 R122: library part CMP-009-00019-6, "Fixed Resistor, Thin Film, 0.125W, 1000ohm, 150V, 0.1% +/-Tol, 15ppm/Cel, Surface Mount, 0805", Case/Package=0805, Max Operating Temperature=125°C, Min Operating Temperature=-55°C, Power=125mW, Tolerance=0.1%, Mounting Technology="Surface Mount", Pins=2, RoHS Compliant=Yes
R107: library part CMP-00072-1, "Trimmer, Cermet, Rest 10 Kilohms, PCB, 25 Turns, Pwr-Rtg 0.5W, 3296 Series", Color=Blue, Insulation Resistance=1GR, Manufacturer=Bourns, Manufacturer Part Number=3296W-1-103LF, Max Operating Temperature=125°C, Max Power Dissipation=500mW, Min Operating Temperature=-55°C, Package Quantity=50, Resistance Tolerance=10%, Resistor Type=Cermet, Temperature Coefficient=100ppm/°C, .Creator=DO, Category="Variable Resistors and Potentiometers", ComponentLink1Description=https://datasheet.ciiva.com/19454/853572-19454866.pdf?src-supplier=Jameco, ComponentLink1URL=https://datasheet.ciiva.com/19454/853572-19454866.pdf?src-supplier=Jameco, ComponentLink2Description=https://datasheet.ciiva.com/11830/0900766b8069ccf4-11830871.pdf?src-supplier=RSComponents, ComponentLink2URL=https://datasheet.ciiva.com/11830/0900766b8069ccf4-11830871.pdf?src-supplier=RSComponents, ComponentLink3Description=https://datasheet.ciiva.com/29122/447277-da-01-en-trimmer-tht3296w-1-103lf-10k-0-5w-29122362.pdf?src-supplier=Conrad, ComponentLink3URL=https://datasheet.ciiva.com/29122/447277-da-01-en-trimmer-tht3296w-1-103lf-10k-0-5w-29122362.pdf?src-supplier=Conrad, ComponentLink4Description=https://datasheet.ciiva.com/26913/3296w-1-103lf-26913885.pdf?src-supplier=IIIC, ComponentLink4URL=https://datasheet.ciiva.com/26913/3296w-1-103lf-26913885.pdf?src-supplier=IIIC, ComponentLink5Description=https://datasheet.ciiva.com/1131/1815117-1131273.pdf?src-supplier=Element14, ComponentLink5URL=https://datasheet.ciiva.com/1131/1815117-1131273.pdf?src-supplier=Element14, ComponentLink6Description=https://datasheet.ciiva.com/18411/70153578-18411561.pdf?src-supplier=Allied+Electronics, ComponentLink6URL=https://datasheet.ciiva.com/18411/70153578-18411561.pdf?src-supplier=Allied+Electronics, ComponentLink7Description=https://datasheet.ciiva.com/3266/3296-3266187.pdf?src-supplier=Avnet, ComponentLink7URL=https://datasheet.ciiva.com/3266/3296-3266187.pdf?src-supplier=Avnet, ComponentLink8Description=https://datasheet.ciiva.com/30093/3296-30093899.pdf?src-supplier=Onlinecomponents.com, ComponentLink8URL=https://datasheet.ciiva.com/30093/3296-30093899.pdf?src-supplier=Onlinecomponents.com, ComponentLink9Description=https://datasheet.ciiva.com/2156/3296-2156893.pdf?src-supplier=Digi-Key, ComponentLink9URL=https://datasheet.ciiva.com/2156/3296-2156893.pdf?src-supplier=Digi-Key, ComponentLink10Description=https://datasheet.ciiva.com/14173/ew3296-dat-e-14173022.pdf?src-supplier=Distrelec, ComponentLink10URL=https://datasheet.ciiva.com/14173/ew3296-dat-e-14173022.pdf?src-supplier=Distrelec, ComponentLink11Description="Where buy it", ComponentLink11URL=https://es.rs-online.com/web/p/potenciometros-de-ajuste/5219647, Contact Plating=Tin,Matte, Depth=4.83mm, Design Item ID=R10k-VTR, Height=0.395inch, Lead Free="Lead Free", Length=9.53mm, Military Standard=Not, Mount="PCB,Through Hole", Number of Turns=25, Packaging=Rail/Tube, Power rating=500mW, Pricing 1="50=2,54800, 100=2,31900, 200=2,14000, 300=1,88400, 500=1,55300 (USD)", Radiation Hardening=No, REACH SVHC="No SVHC", RoHS=Yes, RoHS Compliant=Yes, Series=3296, Source=Passives.SchLib, Stock 1=3300, Taper=Linear, Technology=CERMET, Termination=Pin, Tolerance=10%, Weight=0.03oz, Width=9.53mm
SW101 SW102 SW103 SW104 SW105: library part CMP-00028-00009-1, "Keypad Switch, 1 Switches, SPST, Momentary-tactile, 0.05A, 12VDC, 2.94N, Solder Terminal, Surface Mount-straight", RoHS Compliant=Yes
U1: library part CMP-179-000000-1, "Display; Display: LCD 2x16 characters (blue backlight)", Package="TQFP-64 mikroElektronika", Check_prices=https://www.snapeda.com/parts/LCD%202X16/mikroElektronika/view-part/?ref=eda, Component Type=Standard, Design Item ID=LCD2X16, MF=mikroElektronika, MP="LCD 2X16", Pin Count=16, SnapEDA_Link=https://www.snapeda.com/parts/LCD%202X16/mikroElektronika/view-part/?ref=snap, Source=LCD2X16.SchLib
U2: library part CMP-031-00009-1, "ADC, Successive Approximation, 13-Bit, 1 Func, 4 Channel, Serial Access, PDSO14", Case/Package=SOP, Max Operating Temperature=85°C, Min Operating Temperature=-40°C, Pins=14, RoHS Compliant=Yes

## Via types
v1: diameter 0.7, hole 0.3, Top Layer to Bottom Layer, 3 vias

## Nets (pads, with @x,y where several pads share a name; then routed paths per layer and width w, separated by ;. In a path a pad name is that pad's centre, name@x,y a point inside that pad or via, vN(x,y) a via of type N, cw(c..) or ccw(c..) an arc to the next point about the centre after c; other vN are vias at no path point)
+5: C103.2 C104.2 C105.2 J1.4 J2.1 J7.3 R101.2 R102.2 R103.2 R104.2 R105.2 R106.2 R107.2 R108.2 R109.2 R110.2 R111.2 R112.2 R113.2 R114.2 R115.2 R116.2 R117.2 R118.2 R119.2 R120.1 R121.1 R122.2 TP_5V.1 U1.2 U2.13 U2.14 | length 75.7
  Top Layer w0.5: TP_5V.1 16.803,86.5 18.003,87.7 31.8,87.7 R115.2 32.025,87.525 36.475,87.525 R114.2 38.936,87.55 39.586,88.2 41.497,88.2 43.4,86.297 R108.2 ; R101.2 22.15,25.4 27.9,25.4 R102.2 R103.2 R104.2 ; R122.2 R106.2 R105.2 ; J2.1 110.821,8.052 115.949,8.052 J1.4 ; C105.2 C104.2 ; C103.2 117.963,29.5 118.19,29.727 U2.14 U2.13
Bomba: J5.1 K102.11 | length 14.5
  Top Layer w0.5: K102.11 5.25,75.07 J5.1
CLK: CLK.1 R120.2 U2.11 | length 11.6
  Top Layer w0.5: R120.2 CLK.1 117.803,33.5 119.139,32.164 120.836,32.164 122,31 U2.11
CS: CS.1 R121.2 U2.8 | length 7.4
  Top Layer w0.5: U2.8 125.81,31.027 126.5,31.717 CS.1 R121.2
DOWN: DOWN.1 R111.1 SW103.1 | length 22.1
  Top Layer w0.5: DOWN.1 77.625,19.875 SW103.1 85.189,19.875 86.414,21.1 91.8,21.1 R111.1
ECHO: J2.4 TP_ECHO.1
FC_Inf: J3.6 R114.1 TP_FC_inf.1 | length 23
  Top Layer w0.5: J3.6 36.45,74.05 39.05,74.05 40,75 40,80 36.5,83.5 R114.1 39.45,85.45 TP_FC_inf.1
FC_Sup: J3.5 R115.1 TP_FC_sup.1 | length 20.3
  Top Layer w0.5: TP_FC_sup.1 25.55,85.45 31.95,85.45 R115.1 32.375,85.025 32.975,85.025 38.95,79.05 38.95,76.95 J3.5
GND: C101.1 C102.1 C103.1 C104.1 C105.1 D103.K J1.5 J1.6 J1.7 J1.8 J2.2 J3.1 J3.2 J3.3 J3.4 J4.2 J5.2 J7.4 J8.2 K101.14 K101.A2 K102.14 K102.A2 K103.14 K103.A2 K104.14 K104.A2 Q105.E Q106.E R107.1 SW101.3 SW102.3 SW103.3 SW104.3 SW105.3 TP_GND.1 U1.1 U1.7 U1.8 U1.9 U1.10 U1.16 U2.4 U2.7 U2.12 | length 24.7
  Top Layer w0.5: J2.2 J2.2@110.781,5.552 ; C103.1 112.35,26.864 113.814,25.4 116.229,25.4 117.879,27.05 121.25,27.05 122,26.3 122,28.43 120.73,29.7 U2.12 ; C105.1 C105.1@112.55,26.864 ; J1.8@115.949,5.552 J1.8 ; U2.4 122,25 122.75,24.25 125.06,24.25 125.81,25 U2.7
  other v1: 113.5,14.5
HUM_T: J1.1 TP_HUM_T.1 U2.3 | length 20.9
  Top Layer w0.5: U2.3 120.73,23.967 126,18.697 TP_HUM_T.1 123.5,12 J1.1
LCD_0: U1.6
LCD_1: U1.5
LCD_2: U1.4
LCD_4: U1.11
LCD_5: U1.12
LCD_6: U1.13
LCD_7: U1.14
LED_FALTA_AIGUA: Q106.B TP_LED_AIGUA.1 | length 2.4
  Top Layer w0.5: TP_LED_AIGUA.1 54.525,26.525 54.525,28.875 Q106.B
LED_REG: Q105.B TP_LED_REG.1 | length 3
  Top Layer w0.5: Q105.B 60.05,28.425 61.975,26.5 TP_LED_REG.1
LEFT: LEFT.1 R112.1 SW104.1 | length 23.7
  Top Layer w0.5: LEFT.1 72.771,35.5 73.246,35.975 77.486,35.975 78.711,34.75 SW104.1 82.114,34.75 83.695,36.332 86.468,36.332 91.525,41.389 91.525,42.125 R112.1
LV+in: J8.1 K101.12 K102.12 K103.12 K104.12 TP_LV+in.1 | length 99.7
  Top Layer w1.2: K101.12 12.597,29.303 11.697,29.303 10,31 10,57.865 12.75,60.615 K102.12 ; TP_LV+in.1 21.865,86.5 24.932,83.432 24.932,78.428 24.25,77.746 J8.1 24.25,77.394 24.683,76.961 24.683,75.683 12.956,63.956 12.956,60.856 K102.12 ; K104.12 K103.12 K102.12
MISO: MISO.1 R119.1 U2.10 | length 9.4
  Top Layer w0.5: R119.1 MISO.1 119.691,33.309 120.961,33.309 123.237,31.033 123.237,30.383 U2.10
MOSI: MOSI.1 R118.1 U2.9 | length 7.7
  Top Layer w0.5: R118.1 MOSI.1 124.521,31.979 124.521,30.369 U2.9
NetD101_A: D101.A R105.1 | length 2.9
  Top Layer w0.5: D101.A R105.1
NetD101_K: D101.K Q105.C | length 2.6
  Top Layer w0.5: Q105.C D101.K
NetD102_A: D102.A R106.1 | length 2.9
  Top Layer w0.5: D102.A R106.1
NetD102_K: D102.K Q106.C | length 2.5
  Top Layer w0.5: Q106.C D102.K
NetD103_A: D103.A R122.1 | length 3
  Top Layer w0.5: D103.A R122.1
NetK101_A1: K101.A1 Q101.E | length 24.4
  Top Layer w0.5: K101.A1 12.75,24.725 21.05,33.025 Q101.E
NetK102_A1: K102.A1 Q102.E | length 18.8
  Top Layer w0.5: K102.A1 16.775,43.85 27.05,33.575 Q102.E
NetK103_A1: K103.A1 Q103.E | length 13
  Top Layer w0.5: K103.A1 33.55,38.05 Q103.E
NetK104_A1: K104.A1 Q104.E | length 11.7
  Top Layer w0.5: Q104.E 39.55,41.15 K104.A1
NetQ101_C: Q101.C R101.1 | length 3.3
  Top Layer w0.5: Q101.C 22,27.45 R101.1
NetQ102_C: Q102.C R102.1 | length 3.1
  Top Layer w0.5: R102.1 Q102.C
NetQ103_C: Q103.C R103.1 | length 3.1
  Top Layer w0.5: R103.1 Q103.C
NetQ104_C: Q104.C R104.1 | length 3.1
  Top Layer w0.5: R104.1 Q104.C
NetR107_3: R107.3 U1.3 | length 20.4
  Top Layer w0.5: R107.3 52.54,76.96 U1.3
NetR108_1: R108.1 U1.15 | length 47.9
  Top Layer w0.5: R108.1 45.5,84.65 48.3,87.45 88.61,87.45 U1.15
NTC_H: C101.2 J1.3 R116.1 TP_NTC_H.1 U2.1 | length 18.4
  Top Layer w0.5: U2.1 118.19,24.973 117.5,24.283 TP_NTC_H.1 117.525,22.475 117.525,18.525 117.5,18.5 117.5,14.55 C101.2 117.45,9.425 118.5,8.375 J1.3
NTC_T: C102.2 J1.2 R117.1 TP_NTC_T.1 U2.2 | length 18.5
  Top Layer w0.5: U2.2 119.46,23.581 120.5,22.541 TP_NTC_T.1 120.5,19.05 120.9,18.65 R117.1 120.9,15 120.6,14.7 120.6,14.3 121,13.9 J1.2
OK: OK.1 R110.1 SW102.1 | length 22.9
  Top Layer w0.5: OK.1 84.25,31.5 87.1,34.35 SW102.1 87.1,34.9 90.675,38.475 91.525,38.475 91.9,38.85 R110.1
Persiana+: J3.8 K103.11 | length 15.4
  Top Layer w0.5: K103.11 29.85,73.75 29.85,75.35 J3.8
Persiana-: J3.7 K104.11 | length 12.3
  Top Layer w0.5: J3.7 32.5,66.4 K104.11
RELE1: Q103.B TP_RELE1.1 | length 2.2
  Top Layer w0.5: Q103.B 35.475,33.325 35.475,35.475 TP_RELE1.1
RELE2: Q104.B TP_RELE2.1 | length 2.2
  Top Layer w0.5: Q104.B 41.475,33.325 41.475,35.475 TP_RELE2.1
RELE3: Q101.B TP_RELE3.1 | length 2.2
  Top Layer w0.5: Q101.B 22.975,33.325 22.975,35.475 TP_RELE3.1
RELE4: Q102.B TP_RELE4.1 | length 2.2
  Top Layer w0.5: Q102.B 28.975,33.325 28.975,35.475 TP_RELE4.1
RIGHT: R113.1 RIGHT.1 SW105.1 | length 24
  Top Layer w0.5: RIGHT.1 72.65,28.15 90.45,28.15 SW105.1@91.4,29.1 ; SW105.1 SW105.1@91.4,29.1 ; R113.1 91.95,28.55 SW105.1@91.4,29.1
SCL: J7.1
SDA: J7.2
TRIG: J2.3 TP_TRIG.1
UP: R109.1 SW101.1 UP.1 | length 22.7
  Top Layer w0.5: UP.1 72.6,39.4 83.65,39.4 SW101.1@83.9,39.15 ; SW101.1 SW101.1@83.9,39.15 ; R109.1 91.9,45.85 91.525,45.475 90.5,45.475 84.425,39.4 84.15,39.4 SW101.1@83.9,39.15
Ventilador: J4.1 K101.11 | length 49.3
  Top Layer w0.5: K101.11 7.125,34.525 7.125,68.945 J4.1
pads on no net: J1.9 J2.5 J3.9 J4. J5. J7.0 J8. SW101.2 SW101.4 SW102.2 SW102.4 SW103.2 SW103.4 SW104.2 SW104.4 SW105.2 SW105.4 U1.S1 U1.S2 U1.S3 U1.S4 U2.5 U2.6
copper on no net: | length 431.4
  GND w0.254: 0,5 ccw(c5,5) 5,0 125,0 ccw(c125,5) 130,5 130,85 ccw(c125,85) 125,90 5,90 ccw(c5,85) 0,85 0,5
  other v1: 124,15 124,15

## Polygon pours and split planes (outlines as drawn)
GND on GND "GND_LAYER" (solid, pour order 0): 0,5 0,85 cw(c5,85) 5,90 125,90 cw(c125,85) 130,85 130,5 cw(c125,5) 125,0 5,0 cw(c5,5)
+5 on PWR "+5_LAYER" (solid, pour order 2): 0,5 0,85 cw(c5,85) 5,90 125,90 cw(c125,85) 130,85 130,5 cw(c125,5) 125,0 5,0 cw(c5,5)
GND on Top Layer (solid, remove dead copper, pour order 3): 0,5 0,85 cw(c5,85) 5,90 125,90 cw(c125,85) 130,85 130,5 cw(c125,5) 125,0 5,0 cw(c5,5)

## Other copper
GND:
  text "LM383" at 114,15 h1.52
  text "LM383" at 114,15 h1.52

## Silkscreen, mask and mechanical layers (free items; w line width, h text height)
Mechanical 1:
  the board outline again, w0.254